# Altium PCB 171-5782.PcbDoc
Units mm, origin at the board's own origin, x right, y up, seen from the top; angles counter-clockwise.
Board outline 97.7 x 60.9 mm, 2 copper layers (Top Layer, Bottom Layer), stack 1.57 mm thick; 14 components, 55 nets, 216 pads, 31 vias.
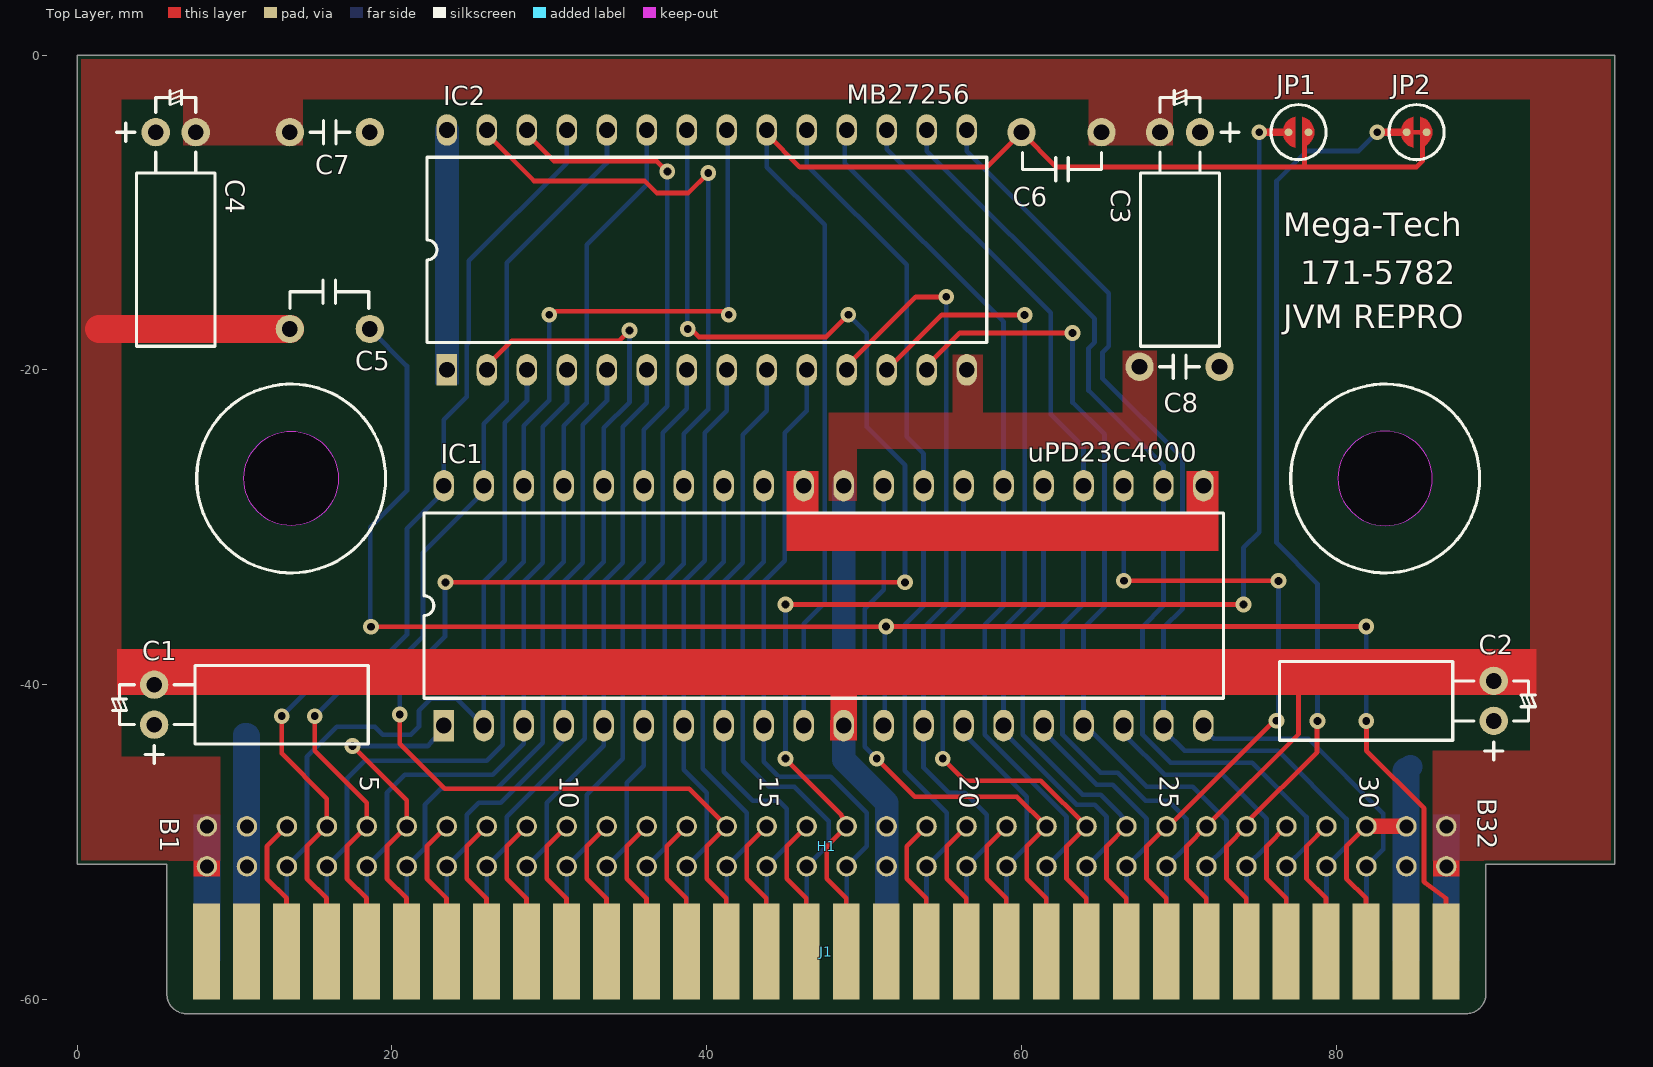
[diagram p0: Top Layer view]
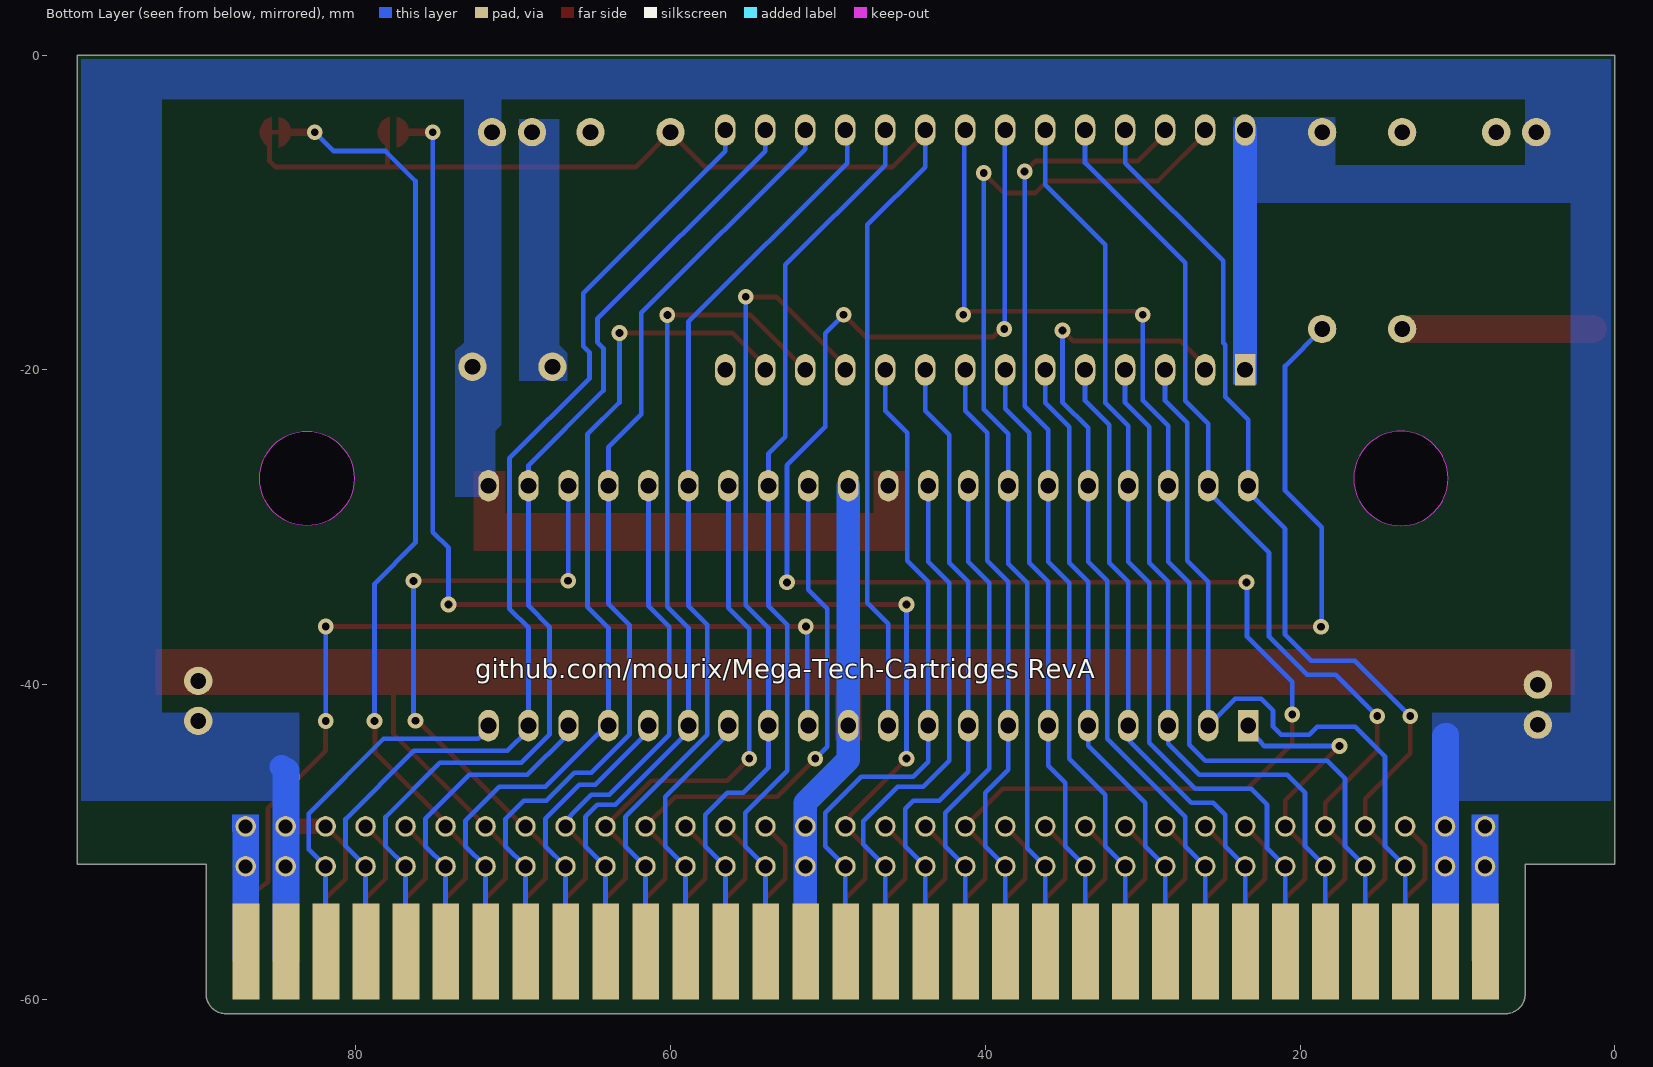
[diagram p1: Bottom Layer view, seen from below]

## Layer stack, top to bottom
Top Solder: solder mask 0.0127, Solder Resist, Dk 3.8
Top Layer: signal copper 0.035
Dielectric: core 1.5, FR-4, Dk 4.5
Bottom Layer: signal copper 0.035
Bottom Solder: solder mask 0.0127, Solder Resist, Dk 3.8

## Board outline
5.7,-59.65 5.7,-51.4 0,-51.4 0,0 97.7,0 97.7,-51.4 89.5,-51.4 89.5,-59.65 89.5,-59.668 cw(c88.25,-59.65) 88.232,-60.9 88.25,-60.9 6.95,-60.9 6.932,-60.9 cw(c6.95,-59.65)
cut-out: 80.1,-26.9 ccw(c83.1,-26.9) 83.1,-29.9 ccw(c83.1,-26.9) 86.1,-26.9 ccw(c83.1,-26.9) 83.1,-23.9 ccw(c83.1,-26.9)
cut-out: 13.6,-29.9 cw(c13.6,-26.9) 10.6,-26.9 cw(c13.6,-26.9) 13.6,-23.9 cw(c13.6,-26.9) 16.6,-26.9 cw(c13.6,-26.9)

## Design rules (kind name [scope] priority, off if disabled: settings)
BoardOutlineClearance [not InComponent('J1')] p1: gap=0.254 ignorepadtopadclearanceinfootprint=FALSE
Clearance [All] p1: gap=0.2 ignorepadtopadclearanceinfootprint=FALSE except(0.15: Arc-Text Track-Text SMDPad-Text THPad-Text Via-Text Fill-Text Poly-Text Region-Text Text-Text; 0.25: Arc-Hole Track-Hole SMDPad-Hole THPad-Hole Via-Hole Fill-Hole Poly-Hole Region-Hole Text-Hole)
ComponentClearance [All] p1: gap=0.127 collisioncheckmode=3 verticalgap=0.127 showdistances=TRUE
DiffPairsRouting [All] p1: maxlimit=0.254 minlimit=0.127 mostfreqgap=0.127 toplayer_minwidth=0.127 toplayer_maxwidth=25.4 toplayer_prefwidth=0.127 bottomlayer_minwidth=0.127 bottomlayer_maxwidth=25.4 bottomlayer_prefwidth=0.127 maxuncoupledlength=12.7
Height [All] p1: minheight=0 maxheight=1816.048 prefheight=12.7
HoleSize [All] p1: absolutevalues=TRUE maxlimit=6.3 minlimit=0.3 maxpercent=80.000 minpercent=20.000
HoleToHoleClearance [All] p1: gap=0.25 allowstackedmicrovias=FALSE
MinimumAnnularRing [All] p1: minimumring=0.076
MinimumSolderMaskSliver [All] p1: minsoldermaskwidth=0.1
PlaneClearance [All] p1: clearance=0.15
PlaneConnect PlaneConnectPowerPads [InPadClass('PowerPads')] p1: planeconnectstyle=Direct reliefexpansion=0.508 reliefentries=4 reliefconductorwidth=0.254 reliefairgap=0.254
PlaneConnect [All] p2: pad.planeconnectstyle=Relief pad.reliefexpansion=0.3 pad.reliefentries=4 pad.reliefconductorwidth=0.127 pad.reliefairgap=0.127 via.planeconnectstyle=Direct via.reliefexpansion=0.3 via.reliefentries=4 via.reliefconductorwidth=0.127 via.reliefairgap=0.127
PolygonConnect [All] p1: connectstyle=Direct reliefconductorwidth=0.254 reliefentries=4 polygonreliefangle="90 Angle" airgapwidth=0.15
RoutingVias [All] p1: holewidth=0.3 width=0.6 viastyle="Through Hole" minholewidth=0.3 minwidth=0.6 maxholewidth=0.6 maxwidth=6.6
SilkToSilkClearance [All] p1: silktosilkclearance=0
SilkToSolderMaskClearance [IsPad] p1: minsilkscreentomaskgap=0.127 clearancetoexposedcopper=TRUE
SolderMaskExpansion SolderMaskExpansion_via [IsVia] p1: expansion=0.102 istentingtop=TRUE
SolderMaskExpansion [All] p2: expansion=0.1 istentingtop=FALSE
Width [All] p1: maxlimit=25.4 minlimit=0.15 preferedwidth=0.254 minimp=50.000000 maximp=50.000000 favimp=50.000000
20 further rules are at their usual default settings.

## Components (designator, comment, footprint, x,y, rotation, side; value= is the part's Value field where it differs from the comment)
C1 "Cap2.54P5.0D" "CapPol Mirror" 4.9,-41.27 r270 top locked value=47uF
C2 "Cap2.54P5.0D" CapPol 90,-41.03 r90 top locked value=10uF
C3 "Cap2.54P5.0D" CapPol 70.07,-4.9 r180 top locked value=10uF
C4 "Cap2.54P5.0D" "CapPol Mirror" 6.27,-4.9 r180 top locked value=10uF
C5 "CapCer" CapCer 16.06,-17.4 r0 top locked value=100nF
C6 "CapCer" CapCer 62.54,-4.9 r180 top locked value=100nF
C7 "CapCer" CapCer 16.06,-4.9 r0 top locked value=22nF
C8 "CapCer" CapCer 70.04,-19.8 r0 top locked value=22nF
H1 "Header_2x32" Header_2x32 8.25,-49 r0 top locked
IC1 "UPD23C4000" UPD23C4000 23.3,-42.6 r90 top locked
IC2 "27256" 27256 23.5,-20 r90 top locked
J1 "MT Cart Edge" MT_Cart_Edge 5.7,-60.9 r0 top locked
JP1 "SolderBridge" SOLDER_BRIDGE 77.6,-4.9 r0 top locked
JP2 "SolderBridge" SOLDER_BRIDGE 85.1,-4.9 r0 top locked

## Footprints (in the part's own frame and the unit in brackets; to place one, negate y for a bottom-side part, rotate by r counter-clockwise, add the part's x,y. Pads: shape width x height; smd on the part's side, far side on the other; paste and mask are expansions set on the pad)
27256 [mm]
  rect 2x1.3 hole 1: 1(0,0)
  oval 2x1.3 hole 1: 2(0,-2.54) 3(0,-5.08) 4(0,-7.62) 5(0,-10.16) 6(0,-12.7) 7(0,-15.24) 8(0,-17.78) 9(0,-20.32) 10(0,-22.86) 11(0,-25.4) 12(0,-27.94) 13(0,-30.48) 14(0,-33.02) 15(15.24,-33.02) 16(15.24,-30.48) 17(15.24,-27.94) 18(15.24,-25.4) 19(15.24,-22.86) 20(15.24,-20.32) 21(15.24,-17.78) 22(15.24,-15.24) 23(15.24,-12.7) 24(15.24,-10.16) 25(15.24,-7.62) 26(15.24,-5.08) 27(15.24,-2.54) 28(15.24,0)
  silkscreen extent 1.73,-34.29 13.51,1.27, body extent 0,-35.31 15.24,2.03, height 5.79
CapCer [mm]
  round 1.8 hole 1: 1(-2.54,0) 2(2.54,0)
CapPol [mm]
  round 1.8 hole 1: 1(-1.27,0) 2(1.27,0)
  silkscreen extent -3.75,-2.68 2.5,13.6
"CapPol Mirror" [mm]
  round 1.8 hole 1: 1(1.27,0) 2(-1.27,0)
  silkscreen extent -2.5,-2.68 3.75,13.6
Header_2x32 [mm]
  round 1.3 hole 0.9: A1(0,-2.54) A2(2.54,-2.54) A3(5.08,-2.54) A4(7.62,-2.54) A5(10.16,-2.54) A6(12.7,-2.54) A7(15.24,-2.54) A8(17.78,-2.54) A9(20.32,-2.54) A10(22.86,-2.54) A11(25.4,-2.54) A12(27.94,-2.54) A13(30.48,-2.54) A14(33.02,-2.54) A15(35.56,-2.54) A16(38.1,-2.54) A17(40.64,-2.54) A18(43.18,-2.54) A19(45.72,-2.54) A20(48.26,-2.54) A21(50.8,-2.54) A22(53.34,-2.54) A23(55.88,-2.54) A24(58.42,-2.54) A25(60.96,-2.54) A26(63.5,-2.54) A27(66.04,-2.54) A28(68.58,-2.54) A29(71.12,-2.54) A30(73.66,-2.54) A31(76.2,-2.54) A32(78.74,-2.54) B1(0,0) B2(2.54,0) B3(5.08,0) B4(7.62,0) B5(10.16,0) B6(12.7,0) B7(15.24,0) B8(17.78,0) B9(20.32,0) B10(22.86,0) B11(25.4,0) B12(27.94,0) B13(30.48,0) B14(33.02,0) B15(35.56,0) B16(38.1,0) B17(40.64,0) B18(43.18,0) B19(45.72,0) B20(48.26,0) B21(50.8,0) B22(53.34,0) B23(55.88,0) B24(58.42,0) B25(60.96,0) B26(63.5,0) B27(66.04,0) B28(68.58,0) B29(71.12,0) B30(73.66,0) B31(76.2,0) B32(78.74,0)
MT_Cart_Edge [mm]
  rect 1.7x6.1 smd far side: A1(2.53,3.95) A2(5.07,3.95) A3(7.61,3.95) A4(10.15,3.95) A5(12.69,3.95) A6(15.23,3.95) A7(17.77,3.95) A8(20.31,3.95) A9(22.85,3.95) A10(25.39,3.95) A11(27.93,3.95) A12(30.47,3.95) A13(33.01,3.95) A14(35.55,3.95) A15(38.09,3.95) A16(40.63,3.95) A17(43.17,3.95) A18(45.71,3.95) A19(48.25,3.95) A20(50.79,3.95) A21(53.33,3.95) A22(55.87,3.95) A23(58.41,3.95) A24(60.95,3.95) A25(63.49,3.95) A26(66.03,3.95) A27(68.57,3.95) A28(71.11,3.95) A29(73.65,3.95) A30(76.19,3.95) A31(78.73,3.95) A32(81.27,3.95)
  rect 1.7x6.1 smd: B1(2.53,3.95) B2(5.07,3.95) B3(7.61,3.95) B4(10.15,3.95) B5(12.69,3.95) B6(15.23,3.95) B7(17.77,3.95) B8(20.31,3.95) B9(22.85,3.95) B10(25.39,3.95) B11(27.93,3.95) B12(30.47,3.95) B13(33.01,3.95) B14(35.55,3.95) B15(38.09,3.95) B16(40.63,3.95) B17(43.17,3.95) B18(45.71,3.95) B19(48.25,3.95) B20(50.79,3.95) B21(53.33,3.95) B22(55.87,3.95) B23(58.41,3.95) B24(60.95,3.95) B25(63.49,3.95) B26(66.03,3.95) B27(68.57,3.95) B28(71.11,3.95) B29(73.65,3.95) B30(76.19,3.95) B31(78.73,3.95) B32(81.27,3.95)
SOLDER_BRIDGE [mm]
  round 0.5 smd: 1(-0.635,0) 2(0.635,0)
  Top Layer region: -0.225,-0.974 -0.625,-0.781 -0.901,-0.433 -1,0 -0.901,0.433 -0.625,0.781 -0.225,0.974 -0.225,0.974
  Top Layer region: 0.225,0.974 0.625,0.781 0.901,0.433 1,0 0.901,-0.433 0.625,-0.781 0.225,-0.974 0.225,-0.974
  silkscreen extent -1.75,-1.75 1.75,1.75
UPD23C4000 [mm]
  rect 2x1.3 hole 1: 1(0,0)
  oval 2x1.3 hole 1: 2(0,-2.54) 3(0,-5.08) 4(0,-7.62) 5(0,-10.16) 6(0,-12.7) 7(0,-15.24) 8(0,-17.78) 9(0,-20.32) 10(0,-22.86) 11(0,-25.4) 12(0,-27.94) 13(0,-30.48) 14(0,-33.02) 15(0,-35.56) 16(0,-38.1) 17(0,-40.64) 18(0,-43.18) 19(0,-45.72) 20(0,-48.26) 21(15.24,-48.26) 22(15.24,-45.72) 23(15.24,-43.18) 24(15.24,-40.64) 25(15.24,-38.1) 26(15.24,-35.56) 27(15.24,-33.02) 28(15.24,-30.48) 29(15.24,-27.94) 30(15.24,-25.4) 31(15.24,-22.86) 32(15.24,-20.32) 33(15.24,-17.78) 34(15.24,-15.24) 35(15.24,-12.7) 36(15.24,-10.16) 37(15.24,-7.62) 38(15.24,-5.08) 39(15.24,-2.54) 40(15.24,0)
  silkscreen extent 1.73,-49.53 13.51,1.27, body extent -0.13,-50.37 15.37,2.03, height 5

## Part data
C1: library part Cap2.54P5.0D_mirror, "Polarized Capacitor, 2.54mm Pitch, 5mm Width, mirrored", Voltage=16V
C2 C3: "Polarized Capacitor, 2.54mm Pitch, 5mm Width"
C4: library part Cap2.54P5.0D_mirror, "Polarized Capacitor, 2.54mm Pitch, 5mm Width, mirrored"
C5 C6 C7 C8: "Capacitor (THT), Ceramic, 5.08mm Pitch"
IC1: "4M Mask Rom"
IC2: "256K EPROM"
J1: library part MT_CART_EDGE_CON
JP1 JP2: "Solder Bridge"

## Via types
v1: diameter 1, hole 0.5, Top Layer to Bottom Layer, tented both sides, 31 vias

## Nets (pads, with @x,y where several pads share a name; then routed paths per layer and width w, separated by ;. In a path a pad name is that pad's centre, name@x,y a point inside that pad or via, vN(x,y) a via of type N, cw(c..) or ccw(c..) an arc to the next point about the centre after c; other vN are vias at no path point)
A0: H1.A17 IC1.9 IC2.10 J1.A17 | length 43.7
  Bottom Layer w0.3: IC2.10 46.355,-20.005 46.355,-22.606 44.958,-24.003 44.958,-32.131 43.62,-33.469 IC1.9 43.62,-44.89 44.577,-45.847 47.879,-45.847 50.165,-48.133 50.165,-50.265 H1.A17 J1.A17@48.89,-57.38
A1: H1.A15 IC1.8 IC2.9 J1.A15 | length 41.7
  Bottom Layer w0.3: J1.A15@43.81,-57.38 H1.A15 45.085,-50.265 45.085,-47.879 44.577,-47.371 42.926,-47.371 41.08,-45.525 IC1.8 41.08,-33.469 42.291,-32.258 42.291,-24.13 43.82,-22.601 IC2.9
A2: H1.A13 IC1.7 IC2.8 J1.A13 | length 39.6
  Bottom Layer w0.3: J1.A13@38.73,-57.38 H1.A13 40.005,-50.265 40.005,-46.863 38.54,-45.398 IC1.7 38.54,-33.469 39.878,-32.131 39.878,-24.003 41.28,-22.601 IC2.8
A3: H1.A11 IC1.6 IC2.7 J1.A11 | length 39.5
  Bottom Layer w0.3: J1.A11@33.65,-57.38 H1.A11 34.925,-50.265 34.925,-46.228 36,-45.153 IC1.6 36,-33.469 37.211,-32.258 37.211,-24.003 38.74,-22.474 IC2.7
A4: H1.A9 IC1.5 IC2.6 J1.A9 | length 40.5
  Bottom Layer w0.3: J1.A9@28.57,-57.38 H1.A9 29.845,-50.265 29.845,-47.498 33.46,-43.883 IC1.5 33.46,-33.469 34.671,-32.258 34.671,-23.622 36.2,-22.093 IC2.6
A5: H1.A7 IC1.4 IC2.5 J1.A7 | length 42.4
  Bottom Layer w0.3: J1.A7@23.49,-57.38 H1.A7 24.765,-50.265 24.765,-48.26 25.527,-47.498 26.924,-47.498 30.771,-43.651 30.771,-42.749 IC1.4 30.92,-33.469 32.131,-32.258 32.131,-23.495 33.66,-21.966 IC2.5
A6: H1.A5 IC1.3 IC2.4 J1.A5 | length 45.9
  Bottom Layer w0.3: J1.A5@18.41,-57.38 H1.A5 19.685,-50.265 19.685,-46.863 20.828,-45.72 26.416,-45.72 28.38,-43.756 IC1.3 28.38,-33.469 29.591,-32.258 29.591,-23.622 31.12,-22.093 IC2.4
A7: H1.A3 IC1.2 IC2.3 J1.A3 | length 51.6
  Bottom Layer w0.3: J1.A3@13.31,-57.4 13.33,-57.38 H1.A3 14.605,-50.265 14.605,-44.577 16.51,-42.672 18.923,-42.672 19.431,-43.18 21.209,-43.18 21.717,-42.672 21.717,-41.656 22.479,-40.894 24.134,-40.894 IC1.2 25.84,-42.096 25.84,-33.469 27.178,-32.131 27.178,-23.368 28.58,-21.966 IC2.3
A8: H1.B4 IC1.40 IC2.25 J1.B4 | length 64
  Top Layer w0.3: v1(13,-42) 13,-44.369 15.87,-47.239 H1.B4 14.605,-50.265 14.605,-52.324 15.85,-53.569 J1.B4@15.85,-57.4
  Bottom Layer w0.3: v1(13,-42) 16.519,-38.481 19.304,-38.481 20.955,-36.83 20.955,-30.099 23.3,-27.754 23.3,-23.182 24.765,-21.717 24.765,-18.415 24.892,-18.288 24.892,-13.081 31.115,-6.858 31.115,-4.765 IC2.25
A9: H1.B5 IC1.39 IC2.24 J1.B5 | length 63.8
  Top Layer w0.3: v1(15.1,-42) 15.1,-44.183 18.41,-47.493 H1.B5 17.145,-50.265 17.145,-52.324 18.39,-53.569 J1.B5@18.39,-57.4
  Bottom Layer w0.3: v1(15.1,-42) 17.73,-39.37 19.558,-39.37 21.971,-36.957 21.971,-31.623 25.84,-27.754 25.84,-23.436 27.305,-21.971 27.305,-13.208 33.66,-6.853 IC2.24
A10: H1.A4 IC1.38 IC2.21 J1.A4 | length 74.6
  Top Layer w0.3: v1(30,-16.5) 30.189,-16.5 30.41,-16.28 40.99,-16.28 41.211,-16.5 v1(41.4,-16.5)
  Bottom Layer w0.3: J1.A4@15.87,-57.38 H1.A4 17.145,-50.265 17.145,-45.974 18.288,-44.831 26.035,-44.831 27.051,-43.815 27.051,-33.528 28.38,-32.199 IC1.38 28.38,-23.563 30,-21.943 v1(30,-16.5) ; IC2.21 41.34,-4.82 41.34,-16.44 v1(41.4,-16.5)
A11: H1.A6 IC1.37 IC2.23 J1.A6 | length 61
  Bottom Layer w0.3: J1.A6@20.95,-57.38 H1.A6 22.098,-50.392 22.098,-47.625 23.114,-46.609 26.67,-46.609 29.591,-43.688 29.591,-33.528 30.92,-32.199 IC1.37 30.92,-23.563 32.385,-22.098 32.385,-12.065 36.2,-8.25 IC2.23
A12: H1.A8 IC1.36 IC2.2 J1.A8 | length 53.9
  Top Layer w0.3: IC2.2 26.04,-19.75 27.629,-18.161 34.439,-18.161 v1(35.1,-17.5)
  Bottom Layer w0.3: J1.A8@26.03,-57.38 H1.A8 27.305,-50.265 27.305,-48.387 32.258,-43.434 32.258,-33.401 33.46,-32.199 IC1.36 33.46,-23.69 35.1,-22.05 v1(35.1,-17.5)
A13: H1.A10 IC1.35 IC2.26 J1.A10 | length 62.8
  Top Layer w0.3: IC2.26 28.58,-5.01 30.301,-6.731 36.831,-6.731 v1(37.5,-7.4)
  Bottom Layer w0.3: J1.A10@31.11,-57.38 H1.A10 32.385,-50.265 32.385,-46.99 34.671,-44.704 34.671,-33.528 36,-32.199 IC1.35 36,-23.817 37.5,-22.317 v1(37.5,-7.4)
A14: H1.A12 IC1.34 IC2.27 J1.A12 | length 67.9
  Top Layer w0.3: IC2.27 26.04,-5.01 29.031,-8.001 36.068,-8.001 36.83,-8.763 38.837,-8.763 v1(40.1,-7.5)
  Bottom Layer w0.3: J1.A12@36.19,-57.38 H1.A12 37.338,-50.392 37.338,-33.528 38.54,-32.326 38.54,-24.071 40.1,-22.511 v1(40.1,-7.5)
A15: H1.A14 IC1.33 J1.A14 | length 32.3
  Bottom Layer w0.3: IC1.33 41.08,-32.199 39.751,-33.528 39.751,-45.339 42.545,-48.133 42.545,-50.265 H1.A14 J1.A14@41.27,-57.38
A16: H1.A16 IC1.32 J1.A16 | length 34.4
  Bottom Layer w0.3: IC1.32 43.62,-32.199 42.291,-33.528 42.291,-44.831 43.942,-46.482 45.571,-46.482 47.752,-48.663 47.752,-50.138 H1.A16 J1.A16@46.35,-57.38
A17: H1.B6 IC1.1 J1.B6 | length 22.5
  Top Layer w0.3: v1(17.5,-43.9) 20.95,-47.35 H1.B6 19.685,-50.265 19.685,-52.324 20.93,-53.569 J1.B6@20.93,-57.4
  Bottom Layer w0.3: v1(17.5,-43.9) 22.267,-43.9 22.479,-43.688 22.479,-43.671 23.3,-42.85 IC1.1
A18: H1.B7 J1.B7 | length 9.4
  Top Layer w0.3: J1.B7@23.47,-57.4 23.47,-53.569 22.225,-52.324 22.225,-50.265 H1.B7
A19: H1.B8 J1.B8 | length 9.4
  Top Layer w0.3: J1.B8@26.01,-57.4 26.01,-53.569 24.765,-52.324 24.765,-50.265 H1.B8
A20: H1.B9 J1.B9 | length 9.4
  Top Layer w0.3: J1.B9@28.55,-57.4 28.55,-53.569 27.305,-52.324 27.305,-50.265 H1.B9
A21: H1.B10 J1.B10 | length 9.4
  Top Layer w0.3: J1.B10@31.09,-57.4 31.09,-53.569 29.845,-52.324 29.845,-50.265 H1.B10
A22: H1.B11 J1.B11 | length 9.4
  Top Layer w0.3: J1.B11@33.63,-57.4 33.63,-53.569 32.385,-52.324 32.385,-50.265 H1.B11
CAS0: C5.2 IC1.12 J1.B32 | length 114.3
  Top Layer w0.3: v1(18.669,-36.322) 18.68,-36.311 51.389,-36.311 v1(51.4,-36.3) v1(81.9,-36.3) ; v1(81.9,-42.3) 81.915,-42.315 81.915,-44.196 85.576,-47.857 85.576,-52.525 86.97,-53.569 J1.B32@86.97,-57.4
  Bottom Layer w0.3: C5.2@18.635,-17.853 18.6,-17.818 C5.2 20.955,-19.755 20.955,-27.686 18.635,-30.006 18.635,-36.288 v1(18.669,-36.322) ; IC1.12 51.32,-42.52 51.32,-36.38 v1(51.4,-36.3) ; v1(81.9,-42.3) v1(81.9,-36.3)
CAS0NC: H1.B16 J1.B16 | length 9.4
  Top Layer w0.3: J1.B16@46.33,-57.4 46.33,-53.569 45.085,-52.324 45.085,-50.265 H1.B16
CAS2: H1.B29 J1.B29 | length 9.4
  Top Layer w0.3: J1.B29@79.35,-57.4 79.35,-53.569 78.105,-52.324 78.105,-50.265 H1.B29
CEO: C6.2 H1.B27 IC1.10 IC2.20 J1.B27 JP1.2 JP2.1 JP2.2 | length 152.6
  Top Layer w0.3: IC2.20 43.82,-5.01 45.922,-7.112 57.788,-7.112 C6.2 62.212,-7.112 77.851,-7.112 ; J1.B27@74.27,-57.4 74.27,-53.569 73.025,-52.324 73.025,-50.265 H1.B27 74.29,-48.773 78.778,-44.285 78.778,-42.322 v1(78.8,-42.3) ; 77.978,-4.953 77.978,-6.985 77.851,-7.112 ; JP2.1 85.325,-4.9 85.471,-5.046 85.471,-6.731 85.09,-7.112 77.851,-7.112
  Top Layer w0.5: v1(82.6,-4.9) JP2.1
  Bottom Layer w0.3: IC2.20 43.82,-7.117 47.498,-10.795 47.498,-34.798 46.16,-36.136 IC1.10 ; v1(78.8,-42.3) 78.8,-33.588 76.2,-30.988 76.2,-8.001 78.105,-6.096 81.404,-6.096 v1(82.6,-4.9)
CEONC: H1.B17 J1.B17 JP1.1 | length 86.5
  Top Layer w0.3: v1(45,-44.7) 48.549,-48.249 48.549,-48.322 48.89,-48.663 H1.B17 47.625,-50.265 47.625,-52.324 48.87,-53.569 J1.B17@48.87,-57.4 ; v1(45,-34.9) v1(74.1,-34.9)
  Top Layer w0.5: v1(75.1,-4.9) JP1.1
  Bottom Layer w0.3: v1(45,-44.7) v1(45,-34.9) ; v1(74.1,-34.9) 74.1,-31.31 75.1,-30.31 v1(75.1,-4.9)
D0: H1.A20 IC1.13 IC2.11 J1.A20 | length 53.8
  Top Layer w0.3: IC2.11 48.9,-19.75 53.283,-15.367 55.205,-15.367 v1(55.216,-15.356)
  Bottom Layer w0.3: v1(55.216,-15.356) 55.216,-34.954 53.78,-36.39 IC1.13 53.78,-45.271 55.372,-46.863 56.388,-46.863 57.785,-48.26 57.785,-50.265 H1.A20 J1.A20@56.51,-57.38
D1: H1.A23 IC1.15 IC2.12 J1.A23 | length 55.5
  Top Layer w0.3: IC2.12 54.93,-16.51 v1(60.198,-16.51)
  Bottom Layer w0.3: v1(60.198,-16.51) 60.198,-35.052 58.86,-36.39 58.86,-42.985 63.5,-47.625 64.643,-47.625 65.405,-48.387 65.405,-50.265 H1.A23 J1.A23@64.13,-57.38
D2: H1.A26 IC1.17 IC2.13 J1.A26 | length 57.7
  Top Layer w0.3: IC2.13 53.98,-19.75 56.077,-17.653 v1(63.246,-17.653)
  Bottom Layer w0.3: v1(63.246,-17.653) 63.246,-22.072 65.278,-24.104 65.278,-35.052 63.94,-36.39 IC1.17@63.94,-42.477 ; IC1.17@63.881,-42.418 IC1.17@63.94,-42.477 ; IC1.17 IC1.17@63.94,-42.477 ; J1.A26@71.75,-57.38 H1.A26 73.025,-50.265 73.025,-48.641 70.866,-46.482 67.945,-46.482 IC1.17@63.94,-42.477
D3: H1.A29 IC1.19 IC2.15 J1.A29 | length 68
  Bottom Layer w0.3: IC2.15 56.52,-6.101 65.542,-15.123 65.542,-18.485 65.151,-18.876 65.151,-20.548 70.231,-25.628 70.231,-35.179 69.02,-36.39 IC1.19 69.02,-42.858 70.358,-44.196 76.305,-44.196 80.645,-48.536 80.645,-50.265 H1.A29 J1.A29@79.37,-57.38
D4: H1.A28 IC1.22 IC2.16 J1.A28 | length 67.6
  Bottom Layer w0.3: IC2.16 53.98,-6.101 64.643,-16.764 64.643,-18.241 64.262,-18.622 64.262,-21.31 69.02,-26.068 69.02,-34.993 67.691,-36.322 67.691,-43.18 69.469,-44.958 74.654,-44.958 78.105,-48.409 78.105,-50.265 H1.A28 J1.A28@76.83,-57.38
D5: H1.A25 IC1.24 IC2.17 J1.A25 | length 63.6
  Bottom Layer w0.3: IC2.17 51.44,-5.974 61.849,-16.383 61.849,-22.834 63.94,-24.925 IC1.24 63.94,-34.866 62.611,-36.195 62.611,-43.18 65.024,-45.593 66.104,-45.593 67.882,-47.371 69.32,-47.371 70.485,-48.536 70.485,-50.265 H1.A25 J1.A25@69.21,-57.38
D6: H1.A22 IC1.26 IC2.18 J1.A22 | length 60
  Bottom Layer w0.3: IC2.18 48.768,-4.892 48.768,-6.858 58.86,-16.95 IC1.26 58.86,-34.993 57.658,-36.195 57.658,-43.18 62.865,-48.387 62.865,-50.265 H1.A22 J1.A22@61.59,-57.38
D7: H1.A19 IC1.28 IC2.19 J1.A19 | length 57.8
  Bottom Layer w0.3: IC2.19 46.36,-6.99 52.705,-13.335 52.705,-24.257 53.78,-25.332 IC1.28 53.78,-34.993 52.578,-36.195 52.578,-45.466 55.245,-48.133 55.245,-50.265 H1.A19 J1.A19@53.97,-57.38
D8: H1.A21 IC1.14 J1.A21 | length 17
  Bottom Layer w0.3: IC1.14 56.32,-43.112 60.325,-47.117 60.325,-50.265 H1.A21 J1.A21@59.05,-57.38
D9: H1.A24 IC1.16 J1.A24 | length 18.6
  Bottom Layer w0.3: IC1.16 61.4,-42.985 64.77,-46.355 65.786,-46.355 67.945,-48.514 67.945,-50.265 H1.A24 J1.A24@66.67,-57.38
D10: H1.A27 IC1.18 J1.A27 | length 21.2
  Bottom Layer w0.3: IC1.18 66.57,-42.69 66.57,-43.202 69.088,-45.72 72.771,-45.72 75.565,-48.514 75.565,-50.265 H1.A27 J1.A27@74.29,-57.38
D11: H1.A30 IC1.20 J1.A30 | length 23.5
  Bottom Layer w0.3: IC1.20 71.56,-42.77 72.224,-43.434 78.232,-43.434 82.987,-48.189 82.987,-50.463 H1.A30 J1.A30@81.91,-57.38
D12: H1.B25 IC1.23 J1.B25 | length 44
  Top Layer w0.3: v1(66.5,-33.4) v1@76.326,-33.4 ; J1.B25@69.19,-57.4 69.19,-53.569 67.945,-52.324 67.945,-50.265 69.448,-48.762 69.589,-48.762 76.06,-42.291 v1(76.2,-42.291)
  Bottom Layer w0.3: IC1.23 66.49,-27.37 66.49,-33.39 v1(66.5,-33.4) ; v1(76.2,-42.291) 76.327,-42.164 v1(76.327,-33.401)
D13: H1.B24 IC1.25 J1.B24 | length 35
  Top Layer w0.3: J1.B24@66.65,-57.4 66.65,-53.569 65.405,-52.324 65.405,-50.265 H1.B24
  Bottom Layer w0.3: IC1.25 61.4,-34.993 60.071,-36.322 60.071,-43.18 63.881,-46.99 65.024,-46.99 66.306,-48.272 66.306,-48.299 66.67,-48.663 H1.B24
D14: H1.B23 IC1.27 J1.B23 | length 38.2
  Top Layer w0.3: v1(55,-44.7) 56.401,-46.101 61.231,-46.101 H1.B23 62.865,-50.265 62.865,-52.324 64.11,-53.569 J1.B23@64.11,-57.4
  Bottom Layer w0.3: v1(55,-44.7) 55,-36.44 56.32,-35.12 IC1.27
D15: H1.B22 IC1.29 J1.B22 | length 40.2
  Top Layer w0.3: v1(50.8,-44.7) 53.217,-47.117 59.707,-47.117 H1.B22 60.325,-50.265 60.325,-52.324 61.57,-53.569 J1.B22@61.57,-57.4
  Bottom Layer w0.3: v1(50.8,-44.7) 50.038,-43.938 50.038,-35.179 51.24,-33.977 IC1.29
DTACK: H1.B20 J1.B20 | length 9.4
  Top Layer w0.3: J1.B20@56.49,-57.4 56.49,-53.569 55.245,-52.324 55.245,-50.265 H1.B20
GND: C1.2 C2.2 C3.2 C4.2 C5.1 C6.1 C7.1 C8.1 H1.A1 H1.A18 H1.A32 H1.B1 H1.B18 H1.B26 H1.B32 IC1.11 IC1.30 IC2.14 J1.A1 J1.A18 J1.A32 J1.B26 | length 84.7
  Top Layer w0.3: J1.B26@71.73,-57.4 71.73,-53.569 70.485,-52.324 70.485,-50.265 H1.B26 77.597,-43.153 77.597,-39.6
  Top Layer w1.7: IC1.11 48.7,-38.803
  Top Layer w1.8: 1.398,-17.4 C5.1
  Bottom Layer w0.3: J1.A1@8.23,-57.4 J1.A1@8.25,-57.38
  Bottom Layer w1.5: IC1.30 IC1.11 48.7,-44.763 51.43,-47.493 H1.B18 H1.A18 51.43,-57.38 J1.A18@51.41,-57.4
  Bottom Layer w1.7: J1.A1@8.25,-57.38 H1.A1 H1.B1@8.25,-49.126 ; J1.A32@86.99,-57.38 H1.A32 H1.B32@86.99,-49.276
LWR: H1.B28 J1.B28 | length 9.4
  Top Layer w0.3: J1.B28@76.81,-57.4 76.81,-53.569 75.565,-52.324 75.565,-50.265 H1.B28
NC1: H1.B3 J1.B3 | length 9.4
  Top Layer w0.3: J1.B3@13.31,-57.4 13.31,-53.569 12.065,-52.324 12.065,-50.265 H1.B3
NC2: H1.B12 J1.B12 | length 9.4
  Top Layer w0.3: J1.B12@36.17,-57.4 36.17,-53.569 34.925,-52.324 34.925,-50.265 H1.B12
NC3: H1.B13 J1.B13 | length 9.4
  Top Layer w0.3: J1.B13@38.71,-57.4 38.71,-53.569 37.465,-52.324 37.465,-50.265 H1.B13
NC4: H1.B15 J1.B15 | length 9.4
  Top Layer w0.3: J1.B15@43.79,-57.4 43.79,-53.569 42.545,-52.324 42.545,-50.265 H1.B15
NC5: H1.B19 J1.B19 | length 9.4
  Top Layer w0.3: J1.B19@53.95,-57.4 53.95,-53.569 52.705,-52.324 52.705,-50.265 H1.B19
NC6: H1.B21 J1.B21 | length 9.4
  Top Layer w0.3: J1.B21@59.03,-57.4 59.03,-53.569 57.785,-52.324 57.785,-50.265 H1.B21
OE: H1.B14 IC2.22 J1.B14 | length 115.1
  Top Layer w0.3: v1(20.5,-41.9) 20.5,-43.741 23.368,-46.609 38.879,-46.609 H1.B14 40.005,-50.265 40.005,-52.324 41.25,-53.569 J1.B14@41.25,-57.4 ; v1(23.4,-33.5) v1(52.6,-33.5) ; v1(38.8,-17.4) 39.002,-17.4 39.509,-17.907 47.593,-17.907 v1(49,-16.5)
  Bottom Layer w0.3: v1(20.5,-41.9) 20.5,-39.825 23.368,-36.957 v1@23.368,-33.532 ; IC2.22 38.77,-4.79 38.77,-17.37 v1(38.8,-17.4) ; v1(49,-16.5) 50.165,-17.665 50.165,-23.622 52.6,-26.057 v1(52.6,-33.5)
VCC: C1.1 C2.1 C3.1 C4.1 C7.2 C8.2 H1.A2 H1.A31 H1.B2 H1.B30 H1.B31 IC1.21 IC1.31 IC2.1 IC2.28 J1.A2 J1.A31 J1.B30 | length 53.8
  Top Layer w0.3: J1.B30@81.89,-57.4 81.89,-53.569 80.645,-52.324 80.645,-50.265 H1.B30
  Top Layer w1: H1.B30 H1.B31
  Bottom Layer w1.5: 10.668,-43.18 10.77,-43.282 ; IC2.1 IC2.28 ; 84.43,-45.491 84.709,-45.212
  Bottom Layer w1.7: J1.A2@10.77,-57.4 10.77,-43.282 ; J1.A31@84.43,-57.4 84.43,-45.491
pads on no net: J1.B1 J1.B2 J1.B18 J1.B31

## Polygon pours and split planes (outlines as drawn)
GND on Top Layer "GND_L01_P000" (solid, remove dead copper, pour order 0): 9.093,-51.181 9.093,-44.577 2.815,-44.577 2.815,-2.794 6.731,-2.794 6.731,-5.715 14.351,-5.715 14.351,-2.794 64.262,-2.794 64.262,-5.715 69.596,-5.715 69.596,-2.794 92.329,-2.794 92.329,-44.196 86.135,-44.196 86.135,-51.181 97.7,-51.181 97.7,0 0,0 0,-51.181
GND on Top Layer "GND_L01_P001" (solid, pour order 1): 47.752,-28.321 47.752,-22.733 55.626,-22.733 55.626,-19.05 57.531,-19.05 57.531,-22.733 66.421,-22.733 66.421,-18.796 68.58,-18.796 68.58,-25.019 49.53,-25.019 49.53,-28.321
GND on Bottom Layer "GND_L02_P004" (solid, remove dead copper, pour order 4): 69.596,-4.064 69.596,-20.699 66.548,-20.699 66.548,-18.923 67.056,-18.415 67.056,-4.064
VCC on Bottom Layer "VCC_L02_P002" (solid, remove dead copper, pour order 2): 11.614,-47.371 0,-47.371 0,0 97.7,0 97.7,-47.371 83.588,-47.371 83.588,-41.783 92.329,-41.783 92.329,-2.794 73.113,-2.794 73.113,-18.249 73.66,-18.796 73.66,-28.067 71.12,-28.067 71.12,-23.876 70.739,-23.495 70.739,-2.794 5.7,-2.794 5.7,-6.985 17.78,-6.985 17.78,-3.937 24.257,-3.937 24.257,-9.398 2.794,-9.398 2.794,-41.783 11.614,-41.783

## Other copper
Top Layer:
  rectangle net GND: 7.394,-52.197 9.096,-51.177
  rectangle net GND: 86.134,-52.197 87.836,-51.177
  rectangle net GND: 47.844,-43.537 49.546,-42.237
  rectangle net VCC: 45.085,-31.496 47.117,-26.416
  rectangle net GND: 2.54,-40.64 92.71,-37.719
  rectangle net VCC: 45.085,-31.496 72.517,-29.083
  rectangle net VCC: 70.485,-31.496 72.517,-26.416
Bottom Layer:
  region net GND: 9.106,-48.241 7.404,-48.241 7.404,-49.363 9.106,-49.363
  region net GND: 87.846,-48.241 86.144,-48.241 86.144,-49.363 87.846,-49.363
  rectangle net VCC: 22.749,-20.937 24.249,-19.637

## Silkscreen, mask and mechanical layers (free items; w line width, h text height)
Top Overlay:
  circle w0.2: c83.1,-26.9 r6
  circle w0.2: c13.6,-26.9 r6
  lines w0.2: 13.52,-16.1 13.52,-15.039 15.627,-15.039 ; 15.627,-15.789 15.627,-14.289 ; 16.427,-15.789 16.427,-14.289 ; 16.427,-15.039 18.535,-15.039 18.535,-16.1 ; 60.065,-6.2 60.065,-7.261 62.173,-7.261 ; 62.173,-8.011 62.173,-6.511 ; 62.973,-8.011 62.973,-6.511 ; 62.973,-7.261 65.08,-7.261 65.08,-6.2
  text "MB27256" at 48.9,-3.102 h1.2
  text "Mega-Tech" at 76.627,-11.519 h1.5
  text "171-5782" at 77.7,-14.559 h1.5
  text "JVM REPRO" at 76.627,-17.353 h1.5
  text "uPD23C4000" at 60.398,-25.835 h1.2
  text "5" at 17.98,-45.793 h1.2 r270
  text "10" at 30.68,-45.793 h1.2 r270
  text "15" at 43.38,-45.793 h1.2 r270
  text "20" at 56.08,-45.793 h1.2 r270
  text "25" at 68.78,-45.793 h1.2 r270
  text "30" at 81.48,-45.793 h1.2 r270
  text "B32" at 88.973,-47.2 h1.2 r270
  text "B1" at 5.28,-48.46 h1.2 r270
Bottom Overlay:
  text "github.com/mourix/Mega-Tech-Cartridges RevA" at 72.4,-39.6 h1.2
Top Solder:
  rectangle: 5.7,-60.9 89.5,-53.8
Bottom Solder:
  rectangle: 5.7,-60.9 89.5,-53.8
Mechanical 1:
  circle w0.15: c13.6,-26.9 r3
  circle w0.15: c83.1,-26.9 r3
  lines w0.15: 5.7,-59.65 5.7,-51.4 0,-51.4 0,0 97.7,0 97.7,-51.4 89.5,-51.4 89.5,-59.65 ; 6.95,-60.9 88.25,-60.9 ; 88.232,-60.9 ccw(c88.25,-59.65) 89.5,-59.668 ; 5.7,-59.632 ccw(c6.95,-59.65) 6.932,-60.9 cw(c6.95,-59.65) 5.7,-59.632